# Altium PCB ChaoticCircuits.PcbDoc
Units mm, origin at the board's own origin, x right, y up, seen from the top; angles counter-clockwise.
Board outline 160 x 100 mm, 2 copper layers (Top Layer, Bottom Layer); 73 components, 61 nets, 339 pads, 0 vias.
Unrouted connection lines stored in the file: 202.
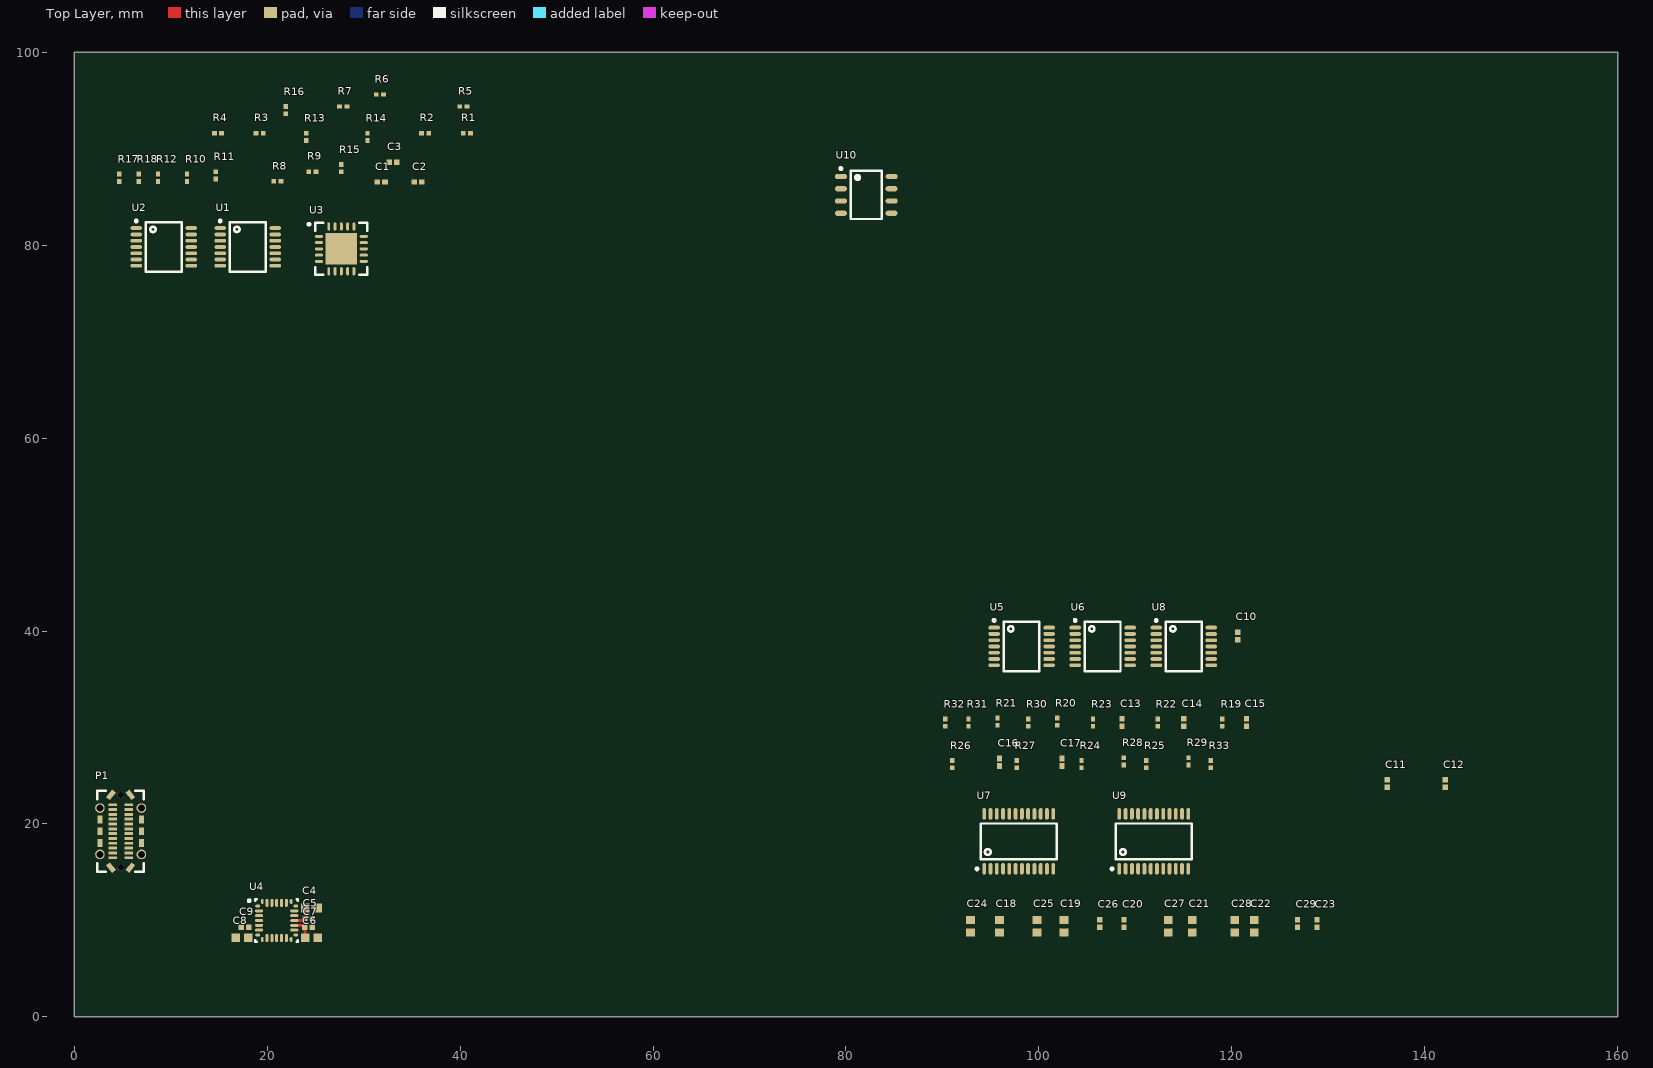
[diagram p0: Top Layer view]
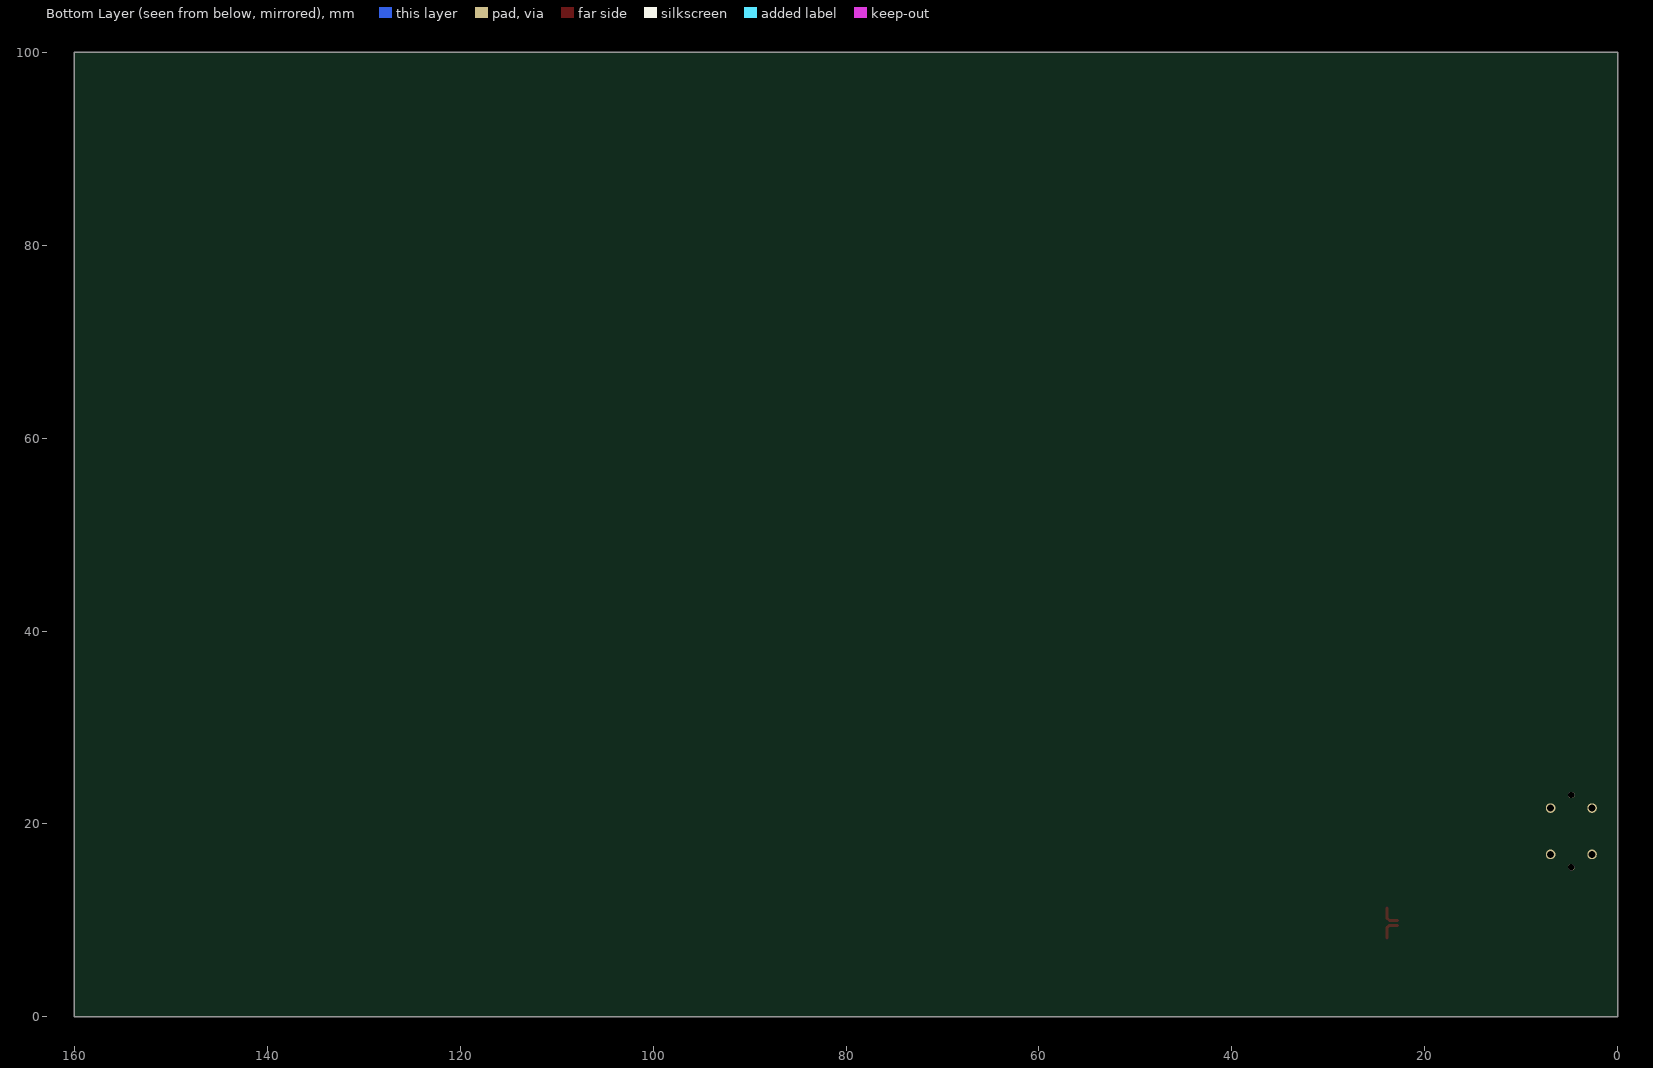
[diagram p1: Bottom Layer view, seen from below]

## Layer stack, top to bottom
Top Solder: solder mask 0.0102, Solder Resist, Dk 3.5
Top Layer: signal copper 0.0356
Dielectric 1: dielectric 0.32, FR-4, Dk 4.8
Bottom Layer: signal copper 0.0356
Bottom Solder: solder mask 0.0102, Solder Resist, Dk 3.5

## Board outline
0,0 0,100 160,100 160,0

## Design rules (kind name [scope] priority, off if disabled: settings)
Clearance [All] p1: gap=0.2 ignorepadtopadclearanceinfootprint=FALSE
ComponentClearance [All] p1: gap=0.254 collisioncheckmode=3 verticalgap=0.1 showdistances=FALSE
HoleSize [All] p1: absolutevalues=TRUE maxlimit=3 minlimit=0.3 maxpercent=80.000 minpercent=20.000
HoleToHoleClearance [All] p1: gap=0.5 allowstackedmicrovias=TRUE
PolygonConnect [All] p1: connectstyle=Relief reliefconductorwidth=0.254 reliefentries=4 polygonreliefangle="90 Angle" airgapwidth=0.254
RoomDefinition U_USB [InComponentClass('U_USB')] p1 off: confinementstyle=ConfineIn formatcopy=TRUE lockcomponents=FALSE outline 15.2,-7.3 22.9,-7.3 22.9,-2 15.2,-2
RoomDefinition U_Roessler [InComponentClass('U_Roessler')] p2 off: confinementstyle=ConfineIn formatcopy=TRUE lockcomponents=FALSE outline 10.1,-21.5 17.3,-21.5 17.3,-13 10.1,-13
RoomDefinition U_AnalogTransform [InComponentClass('U_AnalogTransform')] p3 off: confinementstyle=ConfineIn formatcopy=TRUE lockcomponents=FALSE outline 8,-7.5 12.3,-7.5 12.3,-3.95 8,-3.95
RoomDefinition U_MCU [InComponentClass('U_MCU')] p4 off: confinementstyle=ConfineIn formatcopy=TRUE lockcomponents=FALSE outline 0.8,-14.5 7.3,-14.5 7.3,-11.05 0.8,-11.05
RoomDefinition U_Chua [InComponentClass('U_Chua')] p5 off: confinementstyle=ConfineIn formatcopy=TRUE lockcomponents=FALSE outline 0.049,-7.8 3.4,-7.8 3.4,-4.869 0.049,-4.869
RoutingVias [All] p1: holewidth=0.3 width=0.6 viastyle="Through Hole" minholewidth=0.3 minwidth=0.6 maxholewidth=0.3 maxwidth=0.6
SilkToSilkClearance [All] p1 off: silktosilkclearance=0.254
SilkToSolderMaskClearance [IsPad] p1 off: minsilkscreentomaskgap=0.254 clearancetoexposedcopper=TRUE
SolderMaskExpansion [All] p1: expansion=0.102 istentingtop=FALSE
Width [All] p1: maxlimit=0.7 minlimit=0.2 preferedwidth=0.2
25 further rules are at their usual default settings.

## Classes and differential pairs
net class Z[1..4]: Z1 Z2 Z3 Z4
net class Y[1..4]: Y1 Y2 Y3 Y4
net class X[1..4]: X1 X2 X3 X4
component class U_Roessler: U10
component class U_AnalogTransform: C10 C11 C12 C13 C14 C15 C16 C17 C18 C19 C20 C21 C22 C23 C24 C25 C26 C27 C28 C29 R19 R20 R21 R22 R23 R24 R25 R26 R27 R28 R29 R30 R31 R32 R33 U5 U6 U7 U8 U9
component class U_MCU: C4 C5 C6 C7 C8 C9 U4
component class U_USB: P1
component class U_Chua: C1 C2 C3 R1 R2 R3 R4 R5 R6 R7 R8 R9 R10 R11 R12 R13 R14 R15 R16 R17 R18 U1 U2 U3

## Components (designator, comment, footprint, x,y, rotation, side; value= is the part's Value field where it differs from the comment)
C1 "04025C104JAT2A" CX7R0402C 31.83,86.53 r0 top value=100nF
C2 "04025C104JAT2A" CX7R0402C 35.64,86.53 r0 top value=100nF
C3 "04025C104JAT2A" CX7R0402C 33.04,88.59 r0 top value=100nF
C4 "06036C475JAT2A" CX7R0603K 24.6,11.3 r180 top value=4.7uF
C5 "0402YC104JAT2A" CX7R0402C 24.3,10.2 r180 top value=100nF
C6 "06036C475JAT2A" CX7R0603K 24.6,8.2 r180 top value=4.7uF
C7 "0402YC104JAT2A" CX7R0402C 24.3,9.3 r180 top value=100nF
C8 "06036C105JAT2A" CX7R0603K 17.4,8.2 r0 top value=1uF
C9 "0402YC103JAT2A" CX7R0402C 17.7,9.3 r0 top value=10nF
C10 "04025C104JAT2A" CX7R0402C 120.6,39.49 r90 top value=100nF
C11 "04025C104JAT2A" CX7R0402C 136.1,24.19 r90 top value=100nF
C12 "04025C104JAT2A" CX7R0402C 142.1,24.19 r90 top value=100nF
C13 "04025C104JAT2A" CX7R0402C 108.6,30.51 r90 top value=100nF
C14 "04025C104JAT2A" CX7R0402C 115,30.51 r90 top value=100nF
C15 "04025C104JAT2A" CX7R0402C 121.5,30.51 r90 top value=100nF
C16 "0402YC104JAT2A" CX7R0402C 95.9,26.4 r90 top value=100nF
C17 "0402YC104JAT2A" CX7R0402C 102.399,26.4 r90 top value=100nF
C18 "06036C475JAT2A" CX7R0603K 95.9,9.4 r90 top value=4.7uF
C19 "06036C475JAT2A" CX7R0603K 102.6,9.4 r90 top value=4.7uF
C20 "0402YC104JAT2A" CX7R0402C 108.8,9.7 r90 top value=100nF
C21 "06036C475JAT2A" CX7R0603K 115.9,9.4 r90 top value=4.7uF
C22 "06036C475JAT2A" CX7R0603K 122.3,9.4 r90 top value=4.7uF
C23 "0402YC104JAT2A" CX7R0402C 128.8,9.7 r90 top value=100nF
C24 "06036C475JAT2A" CX7R0603K 92.9,9.4 r90 top value=4.7uF
C25 "06036C475JAT2A" CX7R0603K 99.8,9.4 r90 top value=4.7uF
C26 "0402YC104JAT2A" CX7R0402C 106.3,9.7 r90 top value=100nF
C27 "06036C475JAT2A" CX7R0603K 113.4,9.4 r90 top value=4.7uF
C28 "06036C475JAT2A" CX7R0603K 120.3,9.4 r90 top value=4.7uF
C29 "0402YC104JAT2A" CX7R0402C 126.8,9.7 r90 top value=100nF
P1 "10132328-10011LF" USB_TYPEC_VERTICAL_10132328-10011LF 4.83,19.25 r90 top
R1 "0402FR-07100RL" RC0402 40.7,91.6 r0 top value=100E
R2 "0402FR-07100RL" RC0402 36.382,91.6 r0 top value=100E
R3 "0402FR-07100RL" RC0402 19.237,91.6 r0 top value=100E
R4 "0402FR-07100RL" RC0402 14.919,91.6 r0 top value=100E
R5 "0402FR-07100RL" RC0402 40.342,94.356 r0 top value=100E
R6 "0402FR-07100RL" RC0402 31.7,95.6 r0 top value=100E
R7 "0402FR-07100RL" RC0402 27.896,94.356 r0 top value=100E
R8 "0402FR-07100RL" RC0402 21.075,86.6 r0 top value=100E
R9 "0402FR-07100RL" RC0402 24.7,87.6 r0 top value=100E
R10 "0402FR-07100RL" RC0402 11.7,86.975 r90 top value=100E
R11 "0402FR-07100RL" RC0402 14.7,87.225 r90 top value=100E
R12 "0402FR-07100RL" RC0402 8.7,86.975 r90 top value=100E
R13 "0402FR-07100RL" RC0402 24.063,91.219 r90 top value=100E
R14 "0402FR-07100RL" RC0402 30.413,91.219 r90 top value=100E
R15 "0402FR-07100RL" RC0402 27.7,87.975 r90 top value=100E
R16 "0402FR-07100RL" RC0402 21.927,93.975 r90 top value=100E
R17 "0402FR-07100RL" RC0402 4.7,86.975 r90 top value=100E
R18 "0402FR-07100RL" RC0402 6.7,86.975 r90 top value=100E
R19 "0402FR-07100RL" RC0402 119,30.51 r90 top value=100E
R20 "0402FR-07100RL" RC0402 101.9,30.61 r90 top value=100E
R21 "0402FR-07100RL" RC0402 95.7,30.61 r90 top value=100E
R22 "0402FR-07100RL" RC0402 112.3,30.51 r90 top value=100E
R23 "0402FR-07100RL" RC0402 105.6,30.51 r90 top value=100E
R24 "0402FR-07100RL" RC0402 104.399,26.2 r90 top value=100E
R25 "0402FR-07100RL" RC0402 111.099,26.2 r90 top value=100E
R26 "0402FR-07100RL" RC0402 90.999,26.2 r90 top value=100E
R27 "0402FR-07100RL" RC0402 97.699,26.2 r90 top value=100E
R28 "0402FR-07100RL" RC0402 108.799,26.5 r90 top value=100E
R29 "0402FR-07100RL" RC0402 115.499,26.5 r90 top value=100E
R30 "0402FR-07100RL" RC0402 98.9,30.51 r90 top value=100E
R31 "0402FR-07100RL" RC0402 92.7,30.51 r90 top value=100E
R32 "0402FR-07100RL" RC0402 90.299,30.5 r90 top value=100E
R33 "0402FR-07100RL" RC0402 117.799,26.2 r90 top value=100E
U1 "TL084BIPT" TSSOP14_0.65_C 18,79.8 r0 top
U2 "TL084BIPT" TSSOP14_0.65_C 9.3,79.8 r0 top
U3 "MCP41HV51-502E/MQ" QFN20_0.65_C 27.7,79.6 r0 top value=5k
U4 "STM32F042G4U6" UFQFPN28_0.5_C 21,10 r0 top
U5 "TL084BIPT" TSSOP14_0.65_C 98.199,38.4 r0 top
U6 "TL084BIPT" TSSOP14_0.65_C 106.599,38.4 r0 top
U7 "AD5263BRUZ50" TSSOP24_0.65_C 97.9,18.2 r90 top
U8 "TL084BIPT" TSSOP14_0.65_C 114.999,38.4 r0 top
U9 "AD5263BRUZ50" TSSOP24_0.65_C 111.9,18.2 r90 top
U10 "AD633ARZ-R7" SO8_1.27_C 82.1,85.2 r0 top

## Footprints (in the part's own frame and the unit in brackets; to place one, negate y for a bottom-side part, rotate by r counter-clockwise, add the part's x,y. Pads: shape width x height; smd on the part's side, far side on the other; paste and mask are expansions set on the pad)
CX7R0402C [mm] "Chip Capacitor, 2-Leads, Body 1.00x0.50mm, IPC High Density"
  rect 0.58x0.54 smd: 1(-0.39,0) 2(0.39,0)
  body extent -0.55,-0.3 0.55,0.3, height 0.56
CX7R0603K [mm] "Chip Capacitor, 2-Leads, Body 1.60x0.81mm, IPC High Density"
  rect 0.85x0.9 smd: 1(-0.65,0) 2(0.65,0)
  body extent -0.88,-0.48 0.87,0.48, height 1.02
QFN20_0.65_C [mm] "QFN, 20-Leads, Body 5.00x5.00mm, Pitch 0.65mm, Thermal Pad 3.25x3.25mm, IPC High Density"
  oval 0.85x0.3 smd: 1(-2.325,1.3) 2(-2.325,0.65) 3(-2.325,0) 4(-2.325,-0.65) 5(-2.325,-1.3) 11(2.325,-1.3) 12(2.325,-0.65) 13(2.325,0) 14(2.325,0.65) 15(2.325,1.3)
  oval 0.3x0.85 smd: 6(-1.3,-2.325) 7(-0.65,-2.325) 8(0,-2.325) 9(0.65,-2.325) 10(1.3,-2.325) 16(1.3,2.325) 17(0.65,2.325) 18(0,2.325) 19(-0.65,2.325) 20(-1.3,2.325)
  rect 3.25x3.25 smd: 21(0,0)
  silkscreen extent -3.47,-2.7 2.7,2.7, body extent -2.55,-2.55 2.55,2.55, height 1
RC0402 [mm] "Chip Resistor, 2-Leads, Body 1.00x0.50mm, IPC High Density"
  rect 0.5x0.45 smd: 1(-0.375,0) 2(0.375,0)
  body extent -0.53,-0.27 0.53,0.28, height 0.4
SO8_1.27_C [mm] "SOIC, 8-Leads, Body 4,90x3,90mm, Pitch 1,27mm, IPC High Density"
  oval 1.25x0.55 smd: 1(-2.625,1.905) 2(-2.625,0.635) 3(-2.625,-0.635) 4(-2.625,-1.905) 5(2.625,-1.905) 6(2.625,-0.635) 7(2.625,0.635) 8(2.625,1.905)
  silkscreen extent -2.75,-2.5 1.6,2.85, body extent -2,-2.5 2,2.5, height 1.75
TSSOP14_0.65_C [mm] "TSOP, 14-Leads, Body 5.00x4.40mm, Pitch 0.65mm, IPC High Density"
  oval 1.2x0.4 smd: 1(-2.85,1.95) 2(-2.85,1.3) 3(-2.85,0.65) 4(-2.85,0) 5(-2.85,-0.65) 6(-2.85,-1.3) 7(-2.85,-1.95) 8(2.85,-1.95) 9(2.85,-1.3) 10(2.85,-0.65) 11(2.85,0) 12(2.85,0.65) 13(2.85,1.3) 14(2.85,1.95)
  silkscreen extent -2.97,-2.55 1.85,2.82, body extent -2.25,-2.55 2.25,2.55, height 1.2
TSSOP24_0.65_C [mm] "TSOP, 24-Leads, Body 7.80x4.40mm, Pitch 0.65mm, IPC High Density"
  oval 1.2x0.4 smd: 1(-2.85,3.575) 2(-2.85,2.925) 3(-2.85,2.275) 4(-2.85,1.625) 5(-2.85,0.975) 6(-2.85,0.325) 7(-2.85,-0.325) 8(-2.85,-0.975) 9(-2.85,-1.625) 10(-2.85,-2.275) 11(-2.85,-2.925) 12(-2.85,-3.575) 13(2.85,-3.575) 14(2.85,-2.925) 15(2.85,-2.275) 16(2.85,-1.625) 17(2.85,-0.975) 18(2.85,-0.325) 19(2.85,0.325) 20(2.85,0.975) 21(2.85,1.625) 22(2.85,2.275) 23(2.85,2.925) 24(2.85,3.575)
  silkscreen extent -2.97,-3.95 1.85,4.45, body extent -2.25,-3.95 2.25,3.95, height 1.2
UFQFPN28_0.5_C [mm] "QFN, 28-Leads, Body 4.00x4.00mm, Pitch 0.50mm, IPC High Density"
  oval 0.5x0.3 smd: 1(-1.975,1.5) 7(-1.975,-1.5) 15(1.975,-1.5) 21(1.975,1.5)
  oval 0.85x0.3 smd: 2(-1.825,1) 3(-1.825,0.5) 4(-1.825,0) 5(-1.825,-0.5) 6(-1.825,-1) 16(1.825,-1) 17(1.825,-0.5) 18(1.825,0) 19(1.825,0.5) 20(1.825,1)
  oval 0.3x0.5 smd: 8(-1.5,-1.975) 14(1.5,-1.975) 22(1.5,1.975) 28(-1.5,1.975)
  oval 0.3x0.85 smd: 9(-1,-1.825) 10(-0.5,-1.825) 11(0,-1.825) 12(0.5,-1.825) 13(1,-1.825) 23(1,1.825) 24(0.5,1.825) 25(0,1.825) 26(-0.5,1.825) 27(-1,1.825)
  silkscreen extent -2.97,-2.2 2.2,2.2, body extent -2.05,-2.05 2.05,2.05, height 0.6
USB_TYPEC_VERTICAL_10132328-10011LF [mm] "USB - C (Type - C) USB 3.1 (USB 3.1 Gen 2, Superspeed+) Receptacle Connector 24 Position Surface Mount, Through Hole"
  rect 1.03x0.5 smd rot 141: 1(-3.77,-1) 1(3.77,1)
  rect 1.03x0.5 smd rot 39: 1(-3.77,1) 1(3.77,-1)
  round 0.66 hole 0.66 unplated paste+0 mask+0: 1(-3.75,0) 1(3.75,0)
  round 1 hole 0.7: 1(-2.4,-2.15) 1(-2.4,2.15) 1(2.4,-2.15) 1(2.4,2.15)
  rect 0.82x0.55 smd: 1(-1.2,2.15) 1(-1.2,-2.15) 1(0,2.15) 1(0,-2.15) 1(1.2,2.15) 1(1.2,-2.15)
  rect 0.3x0.85 smd: A1(-2.75,0.83) A2(-2.25,0.83) A3(-1.75,0.83) A4(-1.25,0.83) A5(-0.75,0.83) A6(-0.25,0.83) A7(0.25,0.83) A8(0.75,0.83) A9(1.25,0.83) A10(1.75,0.83) A11(2.25,0.83) A12(2.75,0.83) B1(2.75,-0.83) B2(2.25,-0.83) B3(1.75,-0.83) B4(1.25,-0.83) B5(0.75,-0.83) B6(0.25,-0.83) B7(-0.25,-0.83) B8(-0.75,-0.83) B9(-1.25,-0.83) B10(-1.75,-0.83) B11(-2.25,-0.83) B12(-2.75,-0.83)
  silkscreen extent -4.19,-2.41 4.19,2.41, body extent -4.37,-2.25 4.37,2.25, height 8.8

## Part data
C1 C2 C3 C10 C11 C12 C13 C14 C15: library part kyocera-C-X7R-0402, "SMD Capacitor", CapacitanceCode=104, Dielectric=C, ToleranceCode=J, Value2=50V, VoltageCode=5, MaxThicknessCode=E, Size=0402
C4 C6 C18 C19 C21 C22 C24 C25 C27 C28: library part kyocera-C-X7R-0603, "SMD Capacitor", CapacitanceCode=475, Dielectric=C, ToleranceCode=J, Value2=6.3V, VoltageCode=6, MaxThicknessCode=K, Size=0603
C5 C7 C16 C17 C20 C23 C26 C29: library part kyocera-C-X7R-0402, "SMD Capacitor", CapacitanceCode=104, Dielectric=C, ToleranceCode=J, Value2=16V, VoltageCode=Y, MaxThicknessCode=E, Size=0402
C8: library part kyocera-C-X7R-0603, "SMD Capacitor", CapacitanceCode=105, Dielectric=C, ToleranceCode=J, Value2=6.3V, VoltageCode=6, MaxThicknessCode=K, Size=0603
C9: library part kyocera-C-X7R-0402, "SMD Capacitor", CapacitanceCode=103, Dielectric=C, ToleranceCode=J, Value2=16V, VoltageCode=Y, MaxThicknessCode=E, Size=0402
P1: "USB-C (USB TYPE-C) USB 3.2 Gen 2 (USB 3.1 Gen 2, Superspeed + (USB 3.1)) Receptacle Connector 24 Position Surface Mount, Through Hole", Supplier Part Number 1=609-5380-1-ND, Supplier 1=Digi-Key, Type=10132328-10011LF
R1 R2 R3 R4 R5 R6 R7 R8 R9 R10 R11 R12 R13 R14 R15 R16 R17 R18 R19 R20 R21 R22 R23 R24 R25 R26 R27 R28 R29 R30 R31 R32 R33: library part YAGEO-RC-0402, "SMD Resistor", ResistanceCode=100R, TapingReelAndPower=07, TemperatureCoefficientCode=-, ToleranceCode=F, Value2=62.5mW, DefaultCode=L, PackagingTypeCode=R, Size=0402
U1 U2 U5 U6 U8: library part TL084, "J-FET Amplifier 4 Circuit - 14-TSSOP", Type=TL084BIPT
U3: "Digital Potentiometer 5k Ohm 1 Circuit 256 Taps SPI Interface 20-VQFN (5x5)", Supplier Part Number 1=MCP41HV51-502E/MQ-ND, Supplier 1=Digi-Key, Type=MCP41HV51-502E/MQ
U4: "ARM® Cortex®-M0 series Microcontroller IC 32-Bit 48MHz 16KB (16K x 8) FLASH 28-UFQFPN (4x4)", Supplier Part Number 1=497-17830-ND, Supplier 1=Digi-Key, Type=STM32F042G4U6
U7 U9: "Digital Potentiometer 50k Ohm 4 Circuit 256 Taps I²C, SPI Interface 24-TSSOP", Supplier Part Number 1=505-AD5263BRUZ50-ND, Supplier 1=Digi-Key, Type=AD5263BRUZ50
U10: library part AD633AR-R7, "Analog Multiplier 4-Quadrant 8-SOIC", Supplier 1="Arrow Electronics", Supplier Part Number 1=AD633ARZ-R7, Type=AD633ARZ-R7

## Nets (pads, with @x,y where several pads share a name; then routed paths per layer and width w, separated by ;. In a path a pad name is that pad's centre, name@x,y a point inside that pad or via, vN(x,y) a via of type N, cw(c..) or ccw(c..) an arc to the next point about the centre after c; other vN are vias at no path point)
+3.3V: C4.2 C5.2 C6.2 C7.2 C8.2 C9.2 U4.5 U4.17 U4.18 | length 4.6
  Top Layer w0.3: U4.17 23.69,9.5 23.89,9.3 C7.2 23.93,9.28 23.93,8.22 C6.2 ; U4.18 23.69,10 23.89,10.2 C5.2 23.93,10.22 23.93,11.28 C4.2
+4.5V: C10.2 C11.2 C12.2 C18.2 C19.2 C20.2 C21.2 C22.2 C23.2 U5.4 U6.4 U7.7 U8.4 U9.7
+5V: P1.A4 P1.A9 P1.B4 P1.B9
-4.5V: C13.2 C14.2 C15.2 C24.1 C25.1 C26.1 C27.1 C28.1 C29.1 U5.11 U6.11 U7.18 U8.11 U9.18
"-x' = -(x cos(a) - z sin(a))": R21.2 R31.1 U5.1
"-y' = y sin(b) - z' cos(b)": R25.2 R33.1 U5.14
"-z sin(a)": R20.2 R23.1 U5.7
"-z' = -(x sin(a) + z cos(a))": R24.2 U8.1 U9.23
"-z' cos(b)": R29.1 U6.8 U6.9
CHUA_X: C3.2 R7.1 U1.3 U2.14
CHUA_Y: R3.2 R4.1 U1.5 U2.1
CHUA_Z: C2.2 R1.1 R5.2 R6.2 U1.10 U2.5 U2.10 U3.15
GND: C1.1 C2.1 C4.1 C5.1 C6.1 C7.1 C8.1 C9.1 C10.1 C11.1 C12.1 C13.1 C14.1 C15.1 C16.1 C17.1 P1.1 P1.A1 P1.A12 P1.B1 P1.B12 R10.1 R11.1 R12.1 R13.2 R15.2 R17.2 U1.12 U4.16 U5.3 U5.5 U5.12 U7.1 U7.4 U7.9 U7.21 U7.24 U8.3 U8.10 U8.12 U9.1 U9.4 U9.5 U9.6 U9.9 U9.19 U9.20 U9.21 U9.24
NetC1_2: C1.2 R2.2 R3.1 U2.12
NetC3_1: C3.1 R12.2 U2.3
NetC18_1: C18.1 C19.1 C20.1 C24.2 C25.2 C26.2 U7.8
NetC21_1: C21.1 C22.1 C23.1 C27.2 C28.2 C29.2 U9.8
NetR1_2: R1.2 R2.1 U3.14
NetR4_2: R4.2 R7.2 U2.2 U2.13
NetR5_1: R5.1 R8.2 U2.7
NetR6_1: R6.1 R9.2 U2.8
NetR8_1: R8.1 R10.2 U2.6
NetR9_1: R9.1 R11.2 U2.9
NetR13_1: R13.1 R14.2 U1.2
NetR15_1: R15.1 R16.2 U1.6
NetR17_1: R17.1 R18.2 U1.9
NetR19_2: R19.2 R21.1 R23.2 U5.2
NetR20_1: R20.1 R22.2 U5.6
NetR24_1: R24.1 R26.2 R28.2 U8.2
NetR25_1: R25.1 R27.2 R29.2 U5.13
NetR30_1: R30.1 R31.2 U8.9
NetR32_1: R32.1 R33.2 U8.13
NetU1_13: U1.13 U1.14
NetU4_6: U4.6 U7.2 U7.23
NetU4_7: U4.7 U9.2
NetU5_10: U5.10 U7.6
NetU6_3: U6.3 U7.3
NetU6_5: U6.5 U7.22
NetU6_10: U6.10 U9.22
NetU6_12: U6.12 U7.19
NetU7_5: U7.5 U7.20
NetU7_11: U7.11
NetU7_12: U7.12 U9.12
NetU7_13: U7.13
NetU7_16: U7.16 U9.11
NetU8_5: U8.5 U9.3
NetU9_16: U9.16
SWCLK: U4.22
SWDIO: U4.21
USBD_N: P1.A7 P1.B7 U4.19
USBD_P: P1.A6 P1.B6 U4.20
X4: R14.1 U1.1
"x cos(a)": R19.1 U6.1 U6.2
"x sin(a)": R26.1 U6.6 U6.7
x': R30.2 U8.8
Y4: R16.1 U1.7
"y sin(b)": R27.1 U8.6 U8.7
y': R32.2 U8.14
Z4: R18.1 U1.8
"z cos(a)": R28.1 U5.8 U5.9
"z sin(a)": R22.1 U6.13 U6.14
pads on no net: C16.2 C17.2 P1.A2 P1.A3 P1.A5 P1.A8 P1.A10 P1.A11 P1.B2 P1.B3 P1.B5 P1.B8 P1.B10 P1.B11 U1.4 U1.11 U2.4 U2.11 U3.1 U3.2 U3.3 U3.4 U3.5 U3.6 U3.7 U3.8 U3.9 U3.10 U3.11 U3.12 U3.13 U3.16 U3.17 U3.18 U3.19 U3.20 U3.21 U4.1 U4.2 U4.3 U4.4 U4.8 U4.9 U4.10 U4.11 U4.12 U4.13 U4.14 U4.15 U4.23 U4.24 U4.25 U4.26 U4.27 U4.28 U7.10 U7.14 U7.15 U7.17 U9.10 U9.13 U9.14 U9.15 U9.17 U10.1 U10.2 U10.3 U10.4 U10.5 U10.6 U10.7 U10.8

## Silkscreen, mask and mechanical layers (free items; w line width, h text height)
Board Shape:
  the board outline again, w0.2